# Altium PCB PCB1.pcbdoc (part 1 of 3)
Units mil, origin at the board's own origin, x right, y up, seen from the top; angles counter-clockwise.
Board outline 4439.01 x 4693.87 mil, 2 copper layers (Top Layer, Bottom Layer); 119 components, 135 nets, 555 pads, 196 vias.
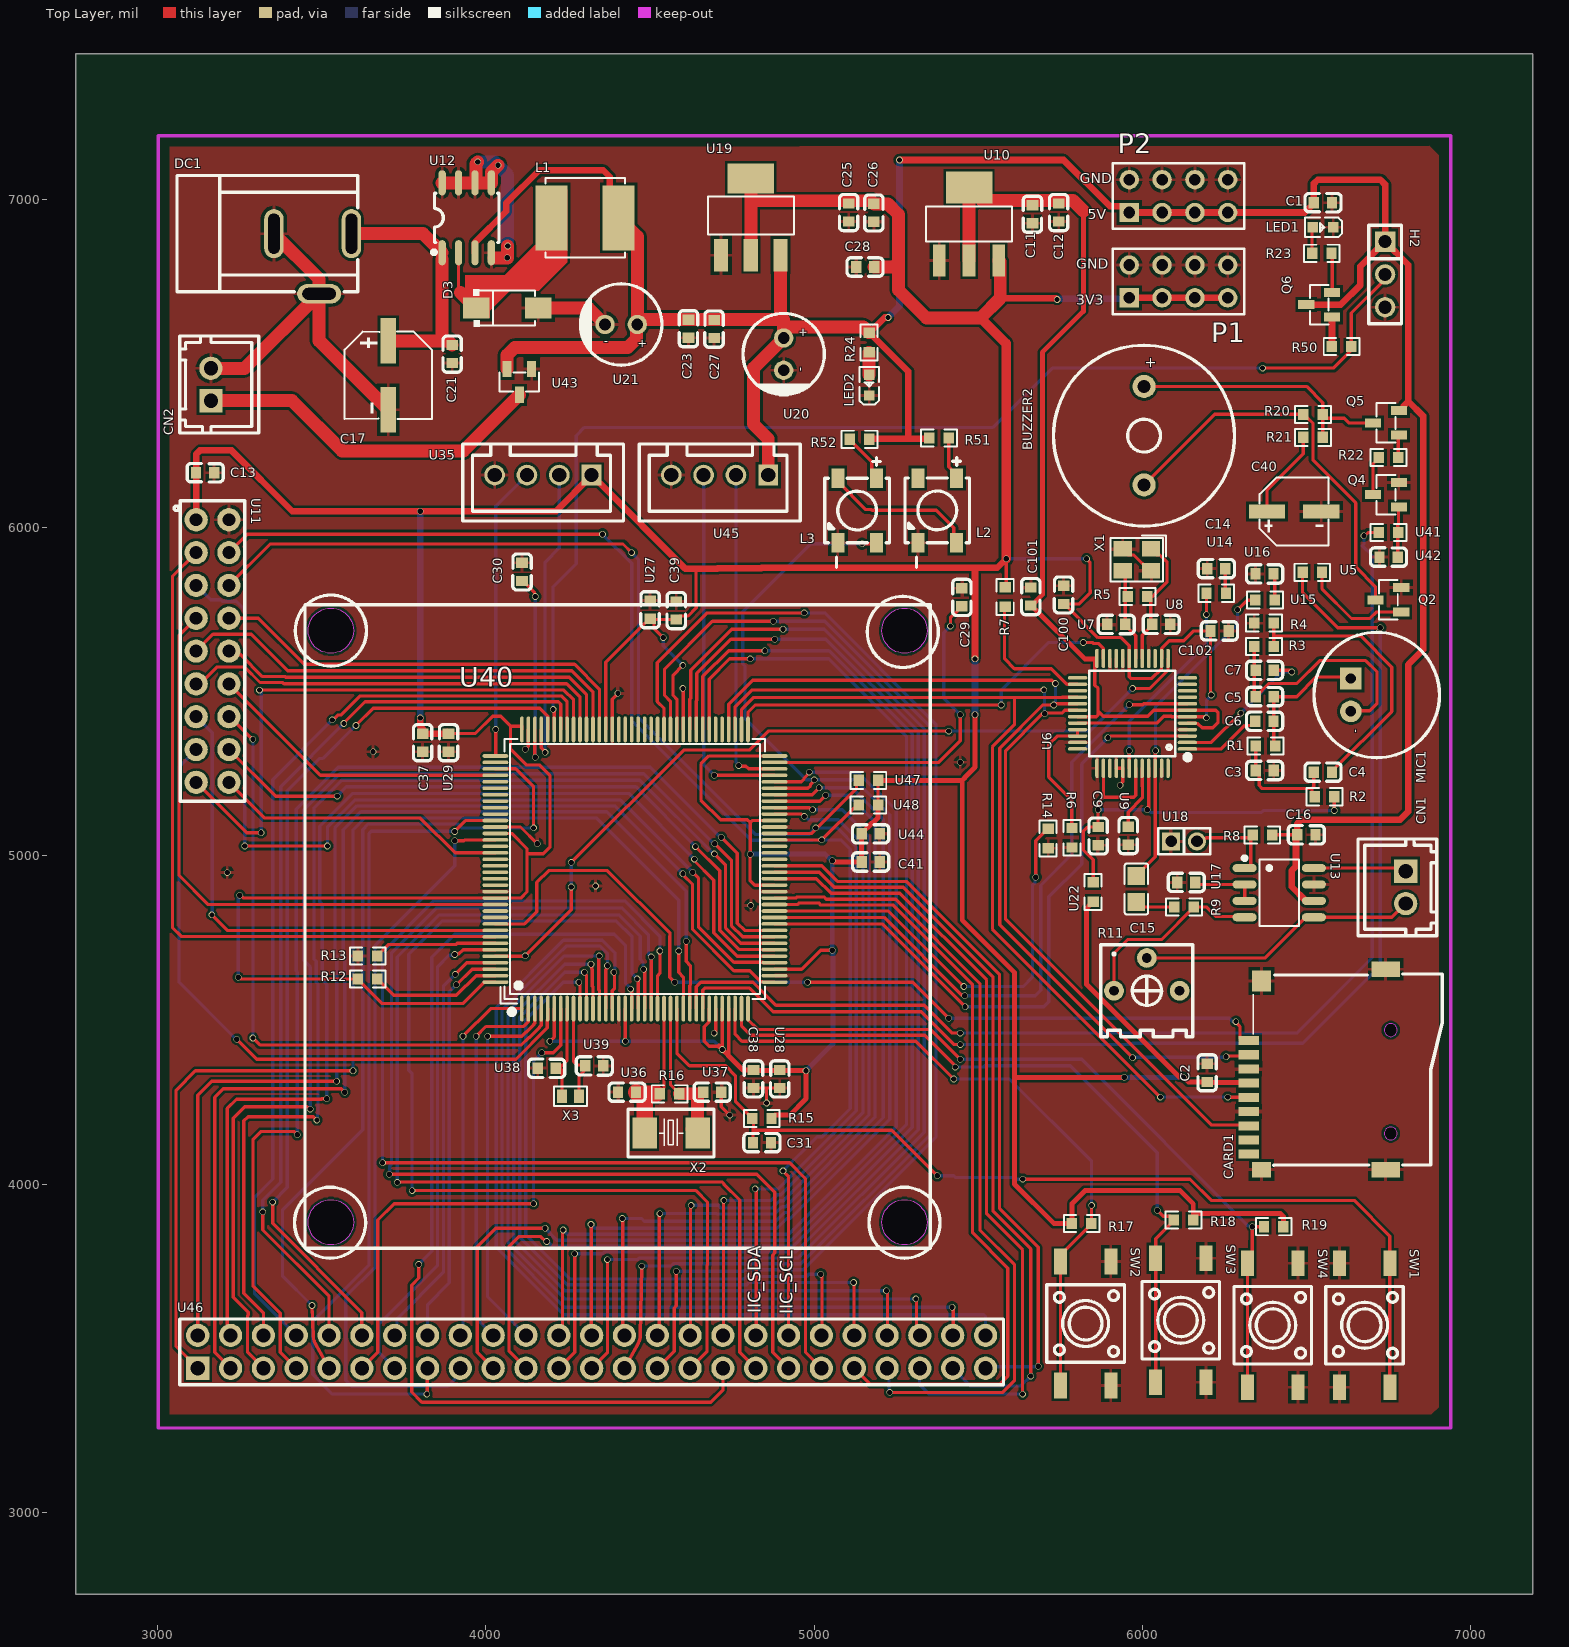
[diagram p0: Top Layer view]
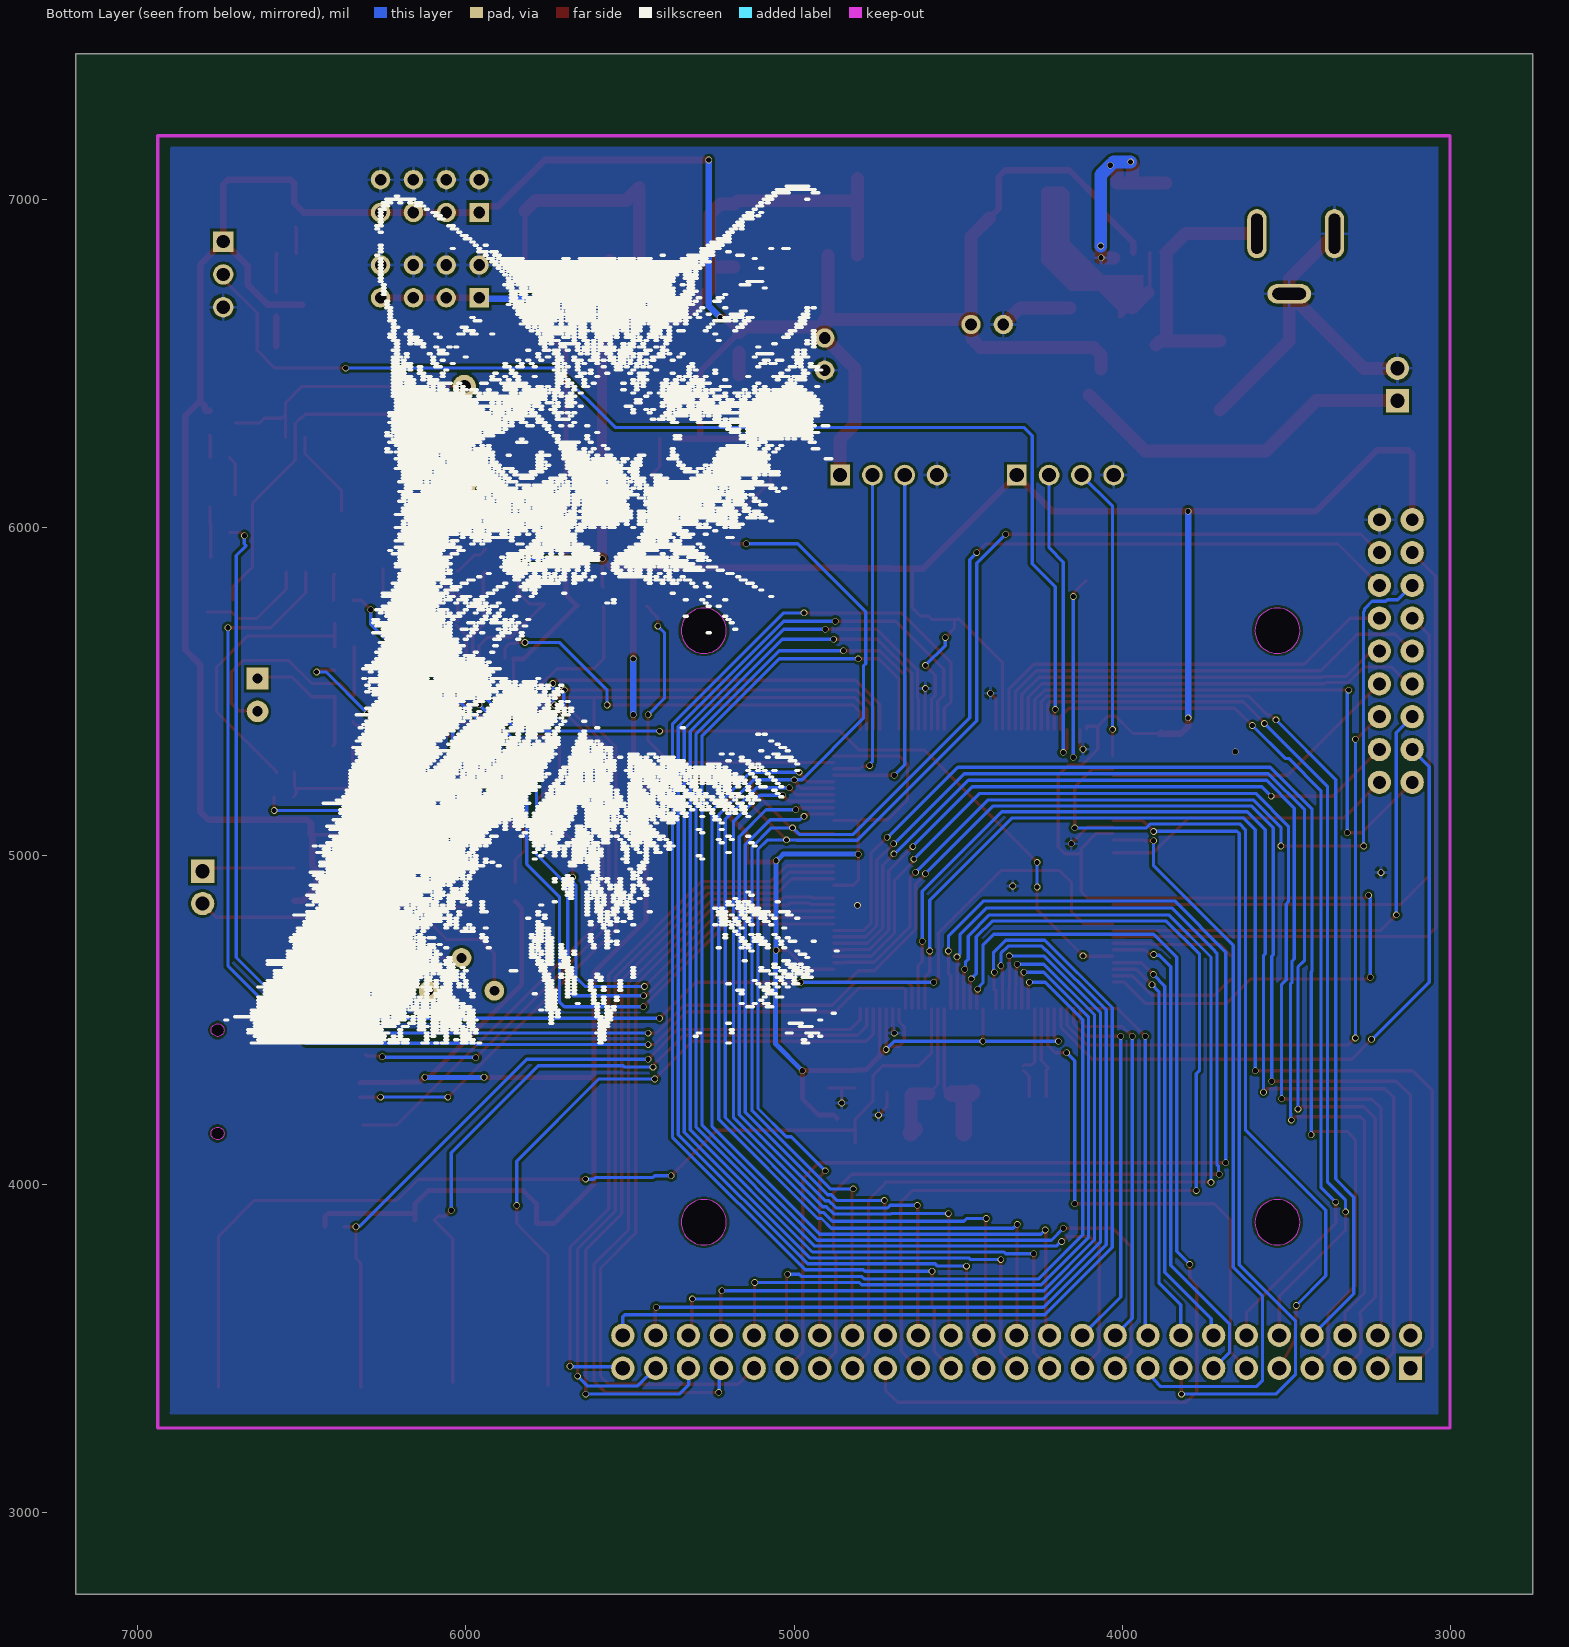
[diagram p1: Bottom Layer view, seen from below]

## Layer stack, top to bottom
Top Solder Mask Layer: solder mask 0.4, Solder Resist, Dk 3.5
Top Layer: signal copper 1.4
Dielectric1: dielectric 12.6, FR-4, Dk 4.8
Bottom Layer: signal copper 1.4
Bottom Solder Mask Layer: solder mask 0.4, Solder Resist, Dk 3.5

## Board outline
7189.01,2750 2750,2750 2750,7443.87 7189.01,7443.87
cut-out: 3527.64,5617.16 cw(c3527.64,5686.06) 3458.74,5686.06 cw(c3527.64,5686.06) 3527.64,5754.95 cw(c3527.64,5686.06) 3596.53,5686.06 cw(c3527.64,5686.06)
cut-out: 5275.15,5617.16 cw(c5275.15,5686.06) 5206.26,5686.06 cw(c5275.15,5686.06) 5275.15,5754.95 cw(c5275.15,5686.06) 5344.05,5686.06 cw(c5275.15,5686.06)
cut-out: 5275.15,3814.64 cw(c5275.15,3883.54) 5206.26,3883.54 cw(c5275.15,3883.54) 5275.15,3952.43 cw(c5275.15,3883.54) 5344.05,3883.54 cw(c5275.15,3883.54)
cut-out: 3527.64,3814.64 cw(c3527.64,3883.54) 3458.74,3883.54 cw(c3527.64,3883.54) 3527.64,3952.43 cw(c3527.64,3883.54) 3596.53,3883.54 cw(c3527.64,3883.54)

## Design rules (kind name [scope] priority, off if disabled: settings)
Clearance [All] p1: gap=8 ignorepadtopadclearanceinfootprint=TRUE except(0: Arc-Hole Track-Hole SMDPad-Hole THPad-Hole Via-Hole Fill-Hole Poly-Hole Region-Hole Text-Hole)
FanoutControl Fanout_Default [All] p1: bgadir=Out bgaviamode=Centered fanoutstyle=Auto fanoutdirection=Alternating viagrid=1 // Fanout_Default (Default Rule)
FanoutControl Fanout_Small [(CompPinCount < 5)] p2: bgadir=Out bgaviamode=Centered fanoutstyle=Auto fanoutdirection=OutThenIn viagrid=1 // Fanout_Small (Default Rule)
FanoutControl Fanout_LCC [IsLCC] p4: bgadir=Out bgaviamode=Centered fanoutstyle=Auto fanoutdirection=Alternating viagrid=1 // Fanout_LCC (Default Rule)
FanoutControl Fanout_BGA [IsBGA] p5: bgadir=Out bgaviamode=Centered fanoutstyle=Auto fanoutdirection=Alternating viagrid=1 // Fanout_BGA (Default Rule)
HoleSize [All] p1: absolutevalues=TRUE maxlimit=157.48 minlimit=11.81 maxpercent=80.000 minpercent=20.000
MinimumSolderMaskSliver [All] p1: minsoldermaskwidth=1.97
PolygonConnect [All] p1: connectstyle=Relief reliefconductorwidth=10 reliefentries=4 polygonreliefangle="90 Angle" airgapwidth=10
RoutingVias [All] p1: holewidth=16 width=20 viastyle="Through Hole" minholewidth=14 minwidth=20 maxholewidth=20 maxwidth=20
SilkToSilkClearance [All] p1: silktosilkclearance=6
SilkToSolderMaskClearance [IsPad] p1: minsilkscreentomaskgap=0 clearancetoexposedcopper=TRUE
SolderMaskExpansion [All] p1: expansion=4 istentingtop=FALSE
UnRoutedNet [All] p1: checkbadconnections=TRUE
Width [All] p1: maxlimit=50 minlimit=8 preferedwidth=10
21 further rules are at their usual default settings.

## Classes and differential pairs
component class 4_POW.schdoc: C11 C12 C17 C21 C23 C25 C26 C27 C28 CN2 D3 DC1 L1 LED2 P1 P2 R24 U10 U12 U19 U20 U21 U22 U43
component class 3_语音模块.schdoc: C3 C4 C5 C6 C7 C9 C14 C15 C16 C100 C101 C102 CN1 MIC1 R1 R2 R3 R4 R5 R6 R7 R8 R9 R11 U6 U7 U8 U9 U13 U14 U15 U16 U17 U18 X1
component class 2_MCU.schdoc: C29 C30 C31 C37 C38 C39 C41 R12 R13 R14 R15 R16 SW1 U27 U28 U29 U35 U36 U37 U38 U39 U40 U44 U45 U46 U47 U48 X2 X3
component class 1_Board.schdoc: BUZZER2 C1 C2 C13 C40 CARD1 H2 L2 L3 LED1 Q2 Q4 Q5 Q6 R17 R18 R19 R20 R21 R22 R23 R50 R51 R52 SW2 SW3 SW4 U5 U11 U41 U42

## Components (designator, comment, footprint, x,y, rotation, side; value= is the part's Value field where it differs from the comment)
BUZZER2 "4000Hz" BUZ-TH_BD14.0-P7.60-D0.7-FD 6005,6279.99 r270 top
C1 "100nF" C0603 6550,6990 r180 top
C2 "100nF" C0603 6197,4338.68 r270 top
C3 "10uF" C0603 6372.56,5260 r0 top
C4 "10uF" C0603 6550,5255 r180 top
C5 "100pF" C0603 6372.44,5485 r0 top
C6 "1uF" C0603 6371.83,5410 r180 top
C7 "1uF" C0603 6372.44,5565 r0 top
C9 "100nF" C0603 5865,5060 r270 top
C11 "100nF" C0603 5665,6955 r90 top
C12 "10uF" C0603 5745,6960 r90 top
C13 "100nF" C0603 3144.26,6167.18 r180 top
C14 "47nF" C0603 6225,5875 r180 top
C15 "470nF" C0805 5981.55,4898.87 r270 top
C16 "100nF" C0603 6499.6,5063.87 r0 top
C17 "470uF" CAP-SMD_BD6.3-L6.6-W6.6-LS7.6-RD 3702,6463.87 r270 top
C21 "100nF" C0603 3897,6528.87 r90 top
C23 "100nF" C0603 4617,6606.16 r90 top
C25 "10uF" C0603 5105,6960 r90 top
C26 "100nF" C0603 5182,6958.87 r90 top
C27 "100nF" C0603 4695,6605 r90 top
C28 "100nF" C0603 5155.23,6793.87 r0 top
C29 "2.2uF" C0603 5450,5787.56 r90 top
C30 "2.2uF" C0603 4110,5865 r90 top
C31 "100nF" C0603 4841.08,4126.13 r0 top
C37 "100nF" C0603 3806.93,5344.49 r270 top
C38 "100nF" C0603 4815,4320 r270 top
C39 "100nF" C0603 4580,5747.44 r90 top
C40 "RST47UF16V034" CAP-SMD_BD5.0-L5.3-W5.3-LS6.0-FD 6462,6048.83 r0 top
C41 "100nF" C0603 5172.34,4981.04 r0 top
C100 "100nF" C0603 5760,5795 r90 top
C101 "100nF" C0603 5660,5790 r90 top
C102 "100nF" C0603 6235,5685 r0 top
CARD1 "TF-01A" TF-SMD_TF-02 6532.2,4348.87 r90 top
CN1 "ZX-XH2.54-2PZZ" CONN-TH_2P-P2.50_HX25003-2A 6802.2,4903.87 r270 top
CN2 "ZX-XH2.54-2PZZ" CONN-TH_2P-P2.50_HX25003-2A 3162,6435.95 r90 top
D3 "SS34" SMA_L4.3-W2.6-LS5.0-RD 4064.88,6668.87 r0 top
DC1 "DC-005-A200" DC-IN-TH_DC-005-A200 3472,6803.87 r0 top
H2 "PM254V-11-03-H85" HDR-TH_3P-P2.54-V-F 6739.43,6771.32 r270 top
L1 "68uH" IND-SMD_L6.0-W6.0_SWPA6045S 4302,6943.65 r0 top
L2 "RGB" RGB 5374.93,6052.39 r180 top
L3 "RGB" RGB 5130.98,6051.96 r180 top
LED1 "NCD0603G1" LED0603-RD 6550,6915 r180 top
LED2 "NCD0603G1" LED0603-RD 5167.76,6433.87 r90 top
MIC1 "GMI9767P-52DB" MIC-TH_BD9.7-P2.54-D0.8-L-FD 6635,5490 r270 top
P1 "Header 4X2" HDR2X4 5960,6700 r0 top
P2 "Header 4X2" HDR2X4 5960,6960 r0 top
Q2 "SS8050" SOT-23-3_L2.9-W1.3-P1.90-LS2.4-BR 6749.37,5780 r0 top
Q4 "SS8050" SOT-23-3_L2.9-W1.3-P1.90-LS2.4-BR 6741.93,6100.41 r0 top
Q5 "SS8550" SOT-23-3_L2.9-W1.3-P1.90-LS2.4-BR 6741.93,6318.87 r0 top
Q6 "SS8050" SOT-23-3_L2.9-W1.3-P1.90-LS2.4-BR 6538.67,6679.41 r0 top
R1 "1k" R0603 6375,5335 r180 top
R2 "1k" R0603 6555,5180 r0 top
R3 "1k" R0603 6370.29,5637.3 r180 top
R4 "1k" R0603 6370.29,5708.87 r180 top
R5 "1MΩ" R0603 5985,5790 r180 top
R6 "100kΩ" R0603 5785,5055 r270 top
R7 "100kΩ" R0603 5582,5788.87 r90 top
R8 "10kΩ" R0603 6365.3,5063.87 r0 top
R9 "1kΩ" R0603 6126.92,4843.87 r0 top
R11 "10kΩ" RES-ADJ-TH_3362P 6013.45,4638.87 r0 top
R12 "0Ω" R0603 3639.66,4625 r180 top
R13 "10kΩ" R0603 3639.66,4695 r180 top
R14 "10kΩ" R0603 5712.96,5052.8 r270 top
R15 "10kΩ" R0603 4840.34,4200 r0 top
R16 "1MΩ" R0603 4559.66,4275 r180 top
R17 "10kΩ" R0603 5815,3880 r180 top
R18 "10kΩ" R0603 6125.34,3890 r0 top
R19 "10kΩ" R0603 6400,3870 r0 top
R20 "2.2kΩ" R0603 6520,6345 r0 top
R21 "330Ω" R0603 6520,6275 r0 top
R22 "1kΩ" R0603 6749.75,6213.87 r0 top
R23 "1kΩ" R0603 6546.5,6835.76 r0 top
R24 "1kΩ" R0603 5167.55,6563.87 r90 top
R50 "1kΩ" R0603 6607,6552 r0 top
R51 "1kΩ" R0603 5380,6273 r180 top
R52 "1kΩ" R0603 5138,6269 r0 top
SW1 "K2-6639SP-C4SC-04" KEY-SMD_4P-L6.0-W6.0-P3.90-LS10.0 6677,3569.89 r270 top
SW2 "K2-6639SP-C4SC-04" KEY-SMD_4P-L6.0-W6.0-P3.90-LS10.0 5827,3574.89 r270 top
SW3 "K2-6639SP-C4SC-04" KEY-SMD_4P-L6.0-W6.0-P3.90-LS10.0 6117,3584.89 r270 top
SW4 "K2-6639SP-C4SC-04" KEY-SMD_4P-L6.0-W6.0-P3.90-LS10.0 6397,3569.89 r270 top
U5 "2kΩ" R0603 6517.62,5863.87 r180 top
U6 "VS1053B-L" LQFP-48_L7.0-W7.0-P0.50-LS9.0-BL 5969.81,5433.87 r90 top
U7 "18pF" C0603 5920,5705 r180 top
U8 "18pF" C0603 6057.56,5705 r0 top
U9 "1uF" C0603 5956.62,5061.31 r270 top
U10 "AMS1117-1.8" SOT-223-4_L6.5-W3.5-P2.30-LS7.0-BR 5471.86,6924.98 r270 top
U11 "PM254-2-09-Z-8.5" HDR-TH_18P-P2.54-V-F-R2-C9-S2.54 3167,5623.87 r270 top
U12 "XL1509-5.0E1" SOIC-8_L5.0-W4.0-P1.27-LS6.0-BL 3941.53,6943.87 r0 top
U13 "NS8002" SOP-8_L4.9-W3.9-P1.27-LS6.0-BL 6417,4887.68 r270 top
U14 "10Ω" R0603 6225,5800 r0 top
U15 "10Ω" R0603 6373.61,5778.91 r0 top
U16 "10nF" C0603 6372,5858.87 r180 top
U17 "1uF" C0603 6133.91,4918.87 r0 top
U18 "PZ200-1-02-Z-C" HDR-TH_2P-P2.00-V-M-3 6126.76,5043.87 r0 top
U19 "AMS1117-3.3" SOT-223-3_L6.5-W3.4-P2.30-LS7.0-BR 4807,6946.78 r270 top
U20 "10uF" CAP-TH_BD6.3-P2.50-D0.5-FD 4907,6528.57 r270 top
U21 "10uF" CAP-TH_BD6.3-P2.50-D0.5-FD 4412,6618.87 r180 top
U22 "10Ω" R0603 5850,4890 r90 top
U27 "10uF" C0603 4500,5750 r90 top
U28 "10uF" C0603 4895,4320 r270 top
U29 "10uF" C0603 3885.91,5344.49 r270 top
U35 "ZX-XH2.54-4PZZ" CONN-TH_4P-P2.50_4PIN 4174.21,6160 r180 top
U36 "18pF" C0603 4429.66,4280 r180 top
U37 "18pF" C0603 4689.66,4280 r0 top
U38 "18pF" C0603 4185.17,4352.53 r0 top
U39 "18pF" C0603 4330,4360 r180 top
U40 "STM32F407ZET6" LQFP-144_L20.0-W20.0-P0.50-LS22.0-BL 4453.9,4959.8 r0 top locked
U41 "2kΩ" R0603 6750,5985 r180 top
U42 "10nF" C0603 6750,5910 r0 top
U43 "SI2301-ZE" SOT-23-3_L2.9-W1.3-P1.90-LS2.4-BR 4102,6443.87 r90 top
U44 "10uF" C0603 5172.34,5066.85 r0 top
U45 "ZX-XH2.54-4PZZ" CONN-TH_4P-P2.50_4PIN 4712.36,6160 r180 top
U46 "PZ2.54-2*25" HDR-TH_50P-P2.54-V-M-R2-C25-S2.54 4322,3488.87 r0 top
U47 "4.7kΩ" R0603 5165,5230 r180 top
U48 "4.7kΩ" R0603 5165,5155 r180 top
X1 "12.288MHz" CRYSTAL-SMD_4P-L3.2-W2.5-BL 5983.31,5901.53 r180 top
X2 "8MHz" OSC-SMD_L5.0-W3.2 4563.95,4155 r180 top
X3 "-" OSC-SMD_2P-L1.6-W1.0 4257.73,4267.53 r0 top

## Footprints (in the part's own frame and the unit in brackets; to place one, negate y for a bottom-side part, rotate by r counter-clockwise, add the part's x,y. Pads: shape width x height; smd on the part's side, far side on the other; paste and mask are expansions set on the pad)
BUZ-TH_BD14.0-P7.60-D0.7-FD [mm]
  round 1.8 hole 1: 1(-3.81,0) 2(3.81,0)
  silkscreen extent -7,-7 7,7
C0603 [mm]
  rect 0.8x0.9 smd: 1(-0.7,0) 2(0.7,0)
  silkscreen extent -1.41,-0.71 1.39,0.72
C0805 [mm]
  rect 1.41x1.35 smd paste-100 mask+0.051: 1(-1,0) 2(1,0)
  silkscreen extent -1.96,-0.9 1.96,0.9
CAP-SMD_BD5.0-L5.3-W5.3-LS6.0-FD [mm]
  rect 2.8x1.1 smd: 1(-2.1,0) 2(2.1,0)
  silkscreen extent -2.66,-2.62 2.66,2.65
CAP-SMD_BD6.3-L6.6-W6.6-LS7.6-RD [mm]
  rect 3.5x1.2 smd: 1(-2.67,0) 2(2.67,0)
  silkscreen extent -3.38,-3.38 3.38,3.38
CAP-TH_BD6.3-P2.50-D0.5-FD [mm]
  round 1.5 hole 0.9 paste+0 mask+0.05: 1(-1.25,0) 2(1.25,0)
  silkscreen extent -3.15,-3.15 3.21,3.15
CONN-TH_2P-P2.50_HX25003-2A [mm]
  rect 1.8x1.8 hole 1.1 paste+0 mask+0.05: 1(-1.25,0)
  round 1.8 hole 1.1 paste+0 mask+0.05: 2(1.25,0)
  silkscreen extent -3.75,-3.7 3.75,2.41
CONN-TH_4P-P2.50_4PIN [mm]
  rect 1.524x1.6 hole 1.1: 1(-3.75,0)
  round 1.6 hole 1.1: 2(-1.25,0) 3(1.25,0) 4(3.75,0)
  silkscreen extent -6.22,-2.41 6.22,3.56
CRYSTAL-SMD_4P-L3.2-W2.5-BL [mm]
  rect 1.4x1.2 smd: 1(-1.1,-0.85) 2(1.1,-0.85) 3(1.1,0.85) 4(-1.1,0.85)
  silkscreen extent -2.26,-1.91 2.03,1.68
DC-IN-TH_DC-005-A200 [mm]
  oval 1.5x3.8 hole 0.9 slot 3.1 at 90 deg: 1(3,2.325) 2(-3,2.325)
  oval 3.4x1.5 hole 0.9 slot 2.6 at 0 deg: 3(0.5,-2.325)
  silkscreen extent -10.5,-2.17 3.5,6.83
HDR2X4 [mm] "Connector; Header; 4x2 Position"
  rect 1.5x1.5 hole 0.9: 1(0,0)
  round 1.5 hole 0.9: 2(0,2.54) 3(2.54,0) 4(2.54,2.54) 5(5.08,0) 6(5.08,2.54) 7(7.62,0) 8(7.62,2.54)
  silkscreen extent -1.27,-1.27 8.89,3.81
HDR-TH_2P-P2.00-V-M-3 [mm]
  rect 1.4x1.4 hole 0.9: 1(-1,0)
  round 1.4 hole 0.9: 2(1,0)
  silkscreen extent -1.99,-1 2.02,1.03
HDR-TH_3P-P2.54-V-F [mil]
  rect 62x62 hole 40.16: 1(-100,0)
  round 62 hole 40.16: 2(0,0) 3(100,0)
  silkscreen extent -150,-50 150,50
HDR-TH_18P-P2.54-V-F-R2-C9-S2.54 [mm]
  round 1.8 hole 1: 1(-10.16,-1.27) 2(-10.16,1.27) 3(-7.62,-1.27) 4(-7.62,1.27) 5(-5.08,-1.27) 6(-5.08,1.27) 7(-2.54,-1.27) 8(-2.54,1.27) 9(0,-1.27) 10(0,1.27) 11(2.54,-1.27) 12(2.54,1.27) 13(5.08,-1.27) 14(5.08,1.27) 15(7.62,-1.27) 16(7.62,1.27) 17(10.16,-1.27) 18(10.16,1.27)
  silkscreen extent -11.63,-2.97 11.63,2.5
HDR-TH_50P-P2.54-V-M-R2-C25-S2.54 [mm]
  rect 1.8x1.8 hole 1.1: 1(-30.48,-1.27)
  round 1.8 hole 1.1: 2(-30.48,1.27) 3(-27.94,-1.27) 4(-27.94,1.27) 5(-25.4,-1.27) 6(-25.4,1.27) 7(-22.86,-1.27) 8(-22.86,1.27) 9(-20.32,-1.27) 10(-20.32,1.27) 11(-17.78,-1.27) 12(-17.78,1.27) 13(-15.24,-1.27) 14(-15.24,1.27) 15(-12.7,-1.27) 16(-12.7,1.27) 17(-10.16,-1.27) 18(-10.16,1.27) 19(-7.62,-1.27) 20(-7.62,1.27) 21(-5.08,-1.27) 22(-5.08,1.27) 23(-2.54,-1.27) 24(-2.54,1.27) 25(0,-1.27) 26(0,1.27) 27(2.54,-1.27) 28(2.54,1.27) 29(5.08,-1.27) 30(5.08,1.27) 31(7.62,-1.27) 32(7.62,1.27) 33(10.16,-1.27) 34(10.16,1.27) 35(12.7,-1.27) 36(12.7,1.27) 37(15.24,-1.27) 38(15.24,1.27) 39(17.78,-1.27) 40(17.78,1.27) 41(20.32,-1.27) 42(20.32,1.27) 43(22.86,-1.27) 44(22.86,1.27) 45(25.4,-1.27) 46(25.4,1.27) 47(27.94,-1.27) 48(27.94,1.27) 49(30.48,-1.27) 50(30.48,1.27)
  silkscreen extent -31.88,-2.54 31.88,2.54
IND-SMD_L6.0-W6.0_SWPA6045S [mm]
  rect 2.474x5.02 smd: 1(-2.603,0) 2(2.603,0)
  silkscreen extent -3.08,-3.08 3.08,3.08
KEY-SMD_4P-L6.0-W6.0-P3.90-LS10.0 [mm]
  rect 2x1 smd: 1(-4.8,1.95) 2(4.8,1.95) 3(-4.8,-1.95) 4(4.8,-1.95)
  silkscreen extent -3,-3 3,3
LED0603-RD [mm]
  rect 0.8x0.8 smd: 1(-0.799,-0.003) 2(0.799,0.003)
  silkscreen extent -1.49,-0.75 1.39,0.76
LQFP-48_L7.0-W7.0-P0.50-LS9.0-BL [mm]
  oval 0.27x1.5 smd paste+0 mask+0.05: 1(-2.75,-4.25) 2(-2.25,-4.25) 3(-1.75,-4.25) 4(-1.25,-4.25) 5(-0.75,-4.25) 6(-0.25,-4.25) 7(0.25,-4.25) 8(0.75,-4.25) 9(1.25,-4.25) 10(1.75,-4.25) 11(2.25,-4.25) 12(2.75,-4.25) 25(2.75,4.25) 26(2.25,4.25) 27(1.75,4.25) 28(1.25,4.25) 29(0.75,4.25) 30(0.25,4.25) 31(-0.25,4.25) 32(-0.75,4.25) 33(-1.25,4.25) 34(-1.75,4.25) 35(-2.25,4.25) 36(-2.75,4.25)
  oval 1.5x0.27 smd paste+0 mask+0.05: 13(4.25,-2.75) 14(4.25,-2.25) 15(4.25,-1.75) 16(4.25,-1.25) 17(4.25,-0.75) 18(4.25,-0.25) 19(4.25,0.25) 20(4.25,0.75) 21(4.25,1.25) 22(4.25,1.75) 23(4.25,2.25) 24(4.25,2.75) 37(-4.25,2.75) 38(-4.25,2.25) 39(-4.25,1.75) 40(-4.25,1.25) 41(-4.25,0.75) 42(-4.25,0.25) 43(-4.25,-0.25) 44(-4.25,-0.75) 45(-4.25,-1.25) 46(-4.25,-1.75) 47(-4.25,-2.25) 48(-4.25,-2.75)
  silkscreen extent -3.59,-4.46 3.3,3.34
LQFP-144_L20.0-W20.0-P0.50-LS22.0-BL [mm]
  oval 0.28x2 smd: 1(-8.75,-10.8) 2(-8.25,-10.8) 3(-7.75,-10.8) 4(-7.25,-10.8) 5(-6.75,-10.8) 6(-6.25,-10.8) 7(-5.75,-10.8) 8(-5.25,-10.8) 9(-4.75,-10.8) 10(-4.25,-10.8) 11(-3.75,-10.8) 12(-3.25,-10.8) 13(-2.75,-10.8) 14(-2.25,-10.8) 15(-1.75,-10.8) 16(-1.25,-10.8) 17(-0.75,-10.8) 18(-0.25,-10.8) 19(0.25,-10.8) 20(0.75,-10.8) 21(1.25,-10.8) 22(1.75,-10.8) 23(2.25,-10.8) 24(2.75,-10.8) 25(3.25,-10.8) 26(3.75,-10.8) 27(4.25,-10.8) 28(4.75,-10.8) 29(5.25,-10.8) 30(5.75,-10.8) 31(6.25,-10.8) 32(6.75,-10.8) 33(7.25,-10.8) 34(7.75,-10.8) 35(8.25,-10.8) 36(8.75,-10.8) 73(8.75,10.8) 74(8.25,10.8) 75(7.75,10.8) 76(7.25,10.8) 77(6.75,10.8) 78(6.25,10.8) 79(5.75,10.8) 80(5.25,10.8) 81(4.75,10.8) 82(4.25,10.8) 83(3.75,10.8) 84(3.25,10.8) 85(2.75,10.8) 86(2.25,10.8) 87(1.75,10.8) 88(1.25,10.8) 89(0.75,10.8) 90(0.25,10.8) 91(-0.25,10.8) 92(-0.75,10.8) 93(-1.25,10.8) 94(-1.75,10.8) 95(-2.25,10.8) 96(-2.75,10.8) 97(-3.25,10.8) 98(-3.75,10.8) 99(-4.25,10.8) 100(-4.75,10.8) 101(-5.25,10.8) 102(-5.75,10.8) 103(-6.25,10.8) 104(-6.75,10.8) 105(-7.25,10.8) 106(-7.75,10.8) 107(-8.25,10.8) 108(-8.75,10.8)
  oval 2x0.28 smd: 37(10.8,-8.75) 38(10.8,-8.25) 39(10.8,-7.75) 40(10.8,-7.25) 41(10.8,-6.75) 42(10.8,-6.25) 43(10.8,-5.75) 44(10.8,-5.25) 45(10.8,-4.75) 46(10.8,-4.25) 47(10.8,-3.75) 48(10.8,-3.25) 49(10.8,-2.75) 50(10.8,-2.25) 51(10.8,-1.75) 52(10.8,-1.25) 53(10.8,-0.75) 54(10.8,-0.25) 55(10.8,0.25) 56(10.8,0.75) 57(10.8,1.25) 58(10.8,1.75) 59(10.8,2.25) 60(10.8,2.75) 61(10.8,3.25) 62(10.8,3.75) 63(10.8,4.25) 64(10.8,4.75) 65(10.8,5.25) 66(10.8,5.75) 67(10.8,6.25) 68(10.8,6.75) 69(10.8,7.25) 70(10.8,7.75) 71(10.8,8.25) 72(10.8,8.75) 109(-10.8,8.75) 110(-10.8,8.25) 111(-10.8,7.75) 112(-10.8,7.25) 113(-10.8,6.75) 114(-10.8,6.25) 115(-10.8,5.75) 116(-10.8,5.25) 117(-10.8,4.75) 118(-10.8,4.25) 119(-10.8,3.75) 120(-10.8,3.25) 121(-10.8,2.75) 122(-10.8,2.25) 123(-10.8,1.75) 124(-10.8,1.25) 125(-10.8,0.75) 126(-10.8,0.25) 127(-10.8,-0.25) 128(-10.8,-0.75) 129(-10.8,-1.25) 130(-10.8,-1.75) 131(-10.8,-2.25) 132(-10.8,-2.75) 133(-10.8,-3.25) 134(-10.8,-3.75) 135(-10.8,-4.25) 136(-10.8,-4.75) 137(-10.8,-5.25) 138(-10.8,-5.75) 139(-10.8,-6.25) 140(-10.8,-6.75) 141(-10.8,-7.25) 142(-10.8,-7.75) 143(-10.8,-8.25) 144(-10.8,-8.75)
  silkscreen extent -10.41,-11.25 10.08,10.08
MIC-TH_BD9.7-P2.54-D0.8-L-FD [mil]
  rect 66x66 hole 31.5: 1(-50,0)
  round 66 hole 31.5: 2(50,0)
  silkscreen extent -191,-112 191,270
OSC-SMD_2P-L1.6-W1.0 [mm]
  rect 0.8x1.06 smd: 1(-0.66,0) 2(0.66,0)
  silkscreen extent -1.29,-0.76 1.29,0.76
OSC-SMD_L5.0-W3.2 [mm]
  rect 1.9x2.4 smd: 1(-2.05,0) 2(2.05,0)
  silkscreen extent -3.32,-1.85 3.33,1.85
R0603 [mil]
  rect 31.75x34.02 smd paste-3937.01 mask+2: 1(-29.66,0) 2(29.66,0)
  silkscreen extent -55,-26 55,26
RES-ADJ-TH_3362P [mil]
  round 60 hole 30: 1(-100,-50) 2(0,50) 3(100,-50)
  silkscreen extent -140,-190 140,90
RGB [mm]
  rect 1x1.5 smd: 1(-1.5,-2.5) 2(1.5,-2.5) 3(1.5,2.5) 4(-1.5,2.5)
  silkscreen extent -2.5,-4.1 2.5,4.4
SMA_L4.3-W2.6-LS5.0-RD [mm]
  rect 2.046x1.62 smd: 1(-2.404,-0.009) 2(2.404,0.009)
  silkscreen extent -2.61,-1.44 2.16,1.44
SOIC-8_L5.0-W4.0-P1.27-LS6.0-BL [mil]
  oval 22.38x76.78 smd: 1(-75,-106.5) 2(-25,-106.5) 3(25,-106.5) 4(75,-106.5) 5(75,106.5) 6(25,106.5) 7(-25,106.5) 8(-75,106.5)
  silkscreen extent -106,-111 98,75
SOP-8_L4.9-W3.9-P1.27-LS6.0-BL [mm]
  oval 0.63x1.865 smd: 1(-1.905,-2.682) 2(-0.635,-2.682) 3(0.635,-2.682) 4(1.905,-2.682) 5(1.905,2.682) 6(0.635,2.682) 7(-0.635,2.682) 8(-1.905,2.682)
  silkscreen extent -2.82,-2.83 2.58,1.52
SOT-23-3_L2.9-W1.3-P1.90-LS2.4-BR [mm]
  rect 1.25x0.7 smd: 1(1,-0.95) 2(1,0.95) 3(-1,0)
  silkscreen extent -0.73,-1.53 0.73,1.53
SOT-223-3_L6.5-W3.4-P2.30-LS7.0-BR [mm]
  rect 2.5x1.1 smd: 1(2.97,-2.3) 2(2.97,0) 3(2.97,2.3)
  rect 2.34x3.6 smd: 4(-2.97,0)
  silkscreen extent -1.57,-3.33 1.37,3.33
SOT-223-4_L6.5-W3.5-P2.30-LS7.0-BR [mm]
  rect 2.47x0.98 smd: 1(2.835,-2.3) 2(2.835,0) 3(2.835,2.3)
  rect 2.47x3.6 smd: 4(-2.835,0)
  silkscreen extent -1.37,-3.33 1.37,3.33
TF-SMD_TF-02 [mm]
  rect 0.7x1.6 smd: 1(2.245,5.3) 2(1.145,5.3) 3(0.046,5.3) 4(-1.054,5.3) 5(-2.154,5.3) 6(-3.255,5.3) 7(-4.354,5.3) 8(-5.454,5.3) 9(-6.554,5.3)
  rect 1.2x1.5 smd: 10(-7.754,4.3)
  rect 1.2x2.2 smd: 11(-7.746,-5.3) 12(7.754,-5.3)
  rect 1.6x1.5 smd: 13(6.854,4.3)
  Board Outline Layer board cut-out: 3.054,-6.2 3.271,-6.15 3.445,-6.012 3.541,-5.811 3.541,-5.589 3.445,-5.388 3.271,-5.25 3.054,-5.2 3.054,-5.2 2.837,-5.25 2.663,-5.388 2.567,-5.589 2.567,-5.811 2.663,-6.012 2.837,-6.15 3.054,-6.2 3.054,-6.2
  Board Outline Layer board cut-out: -4.946,-6.2 -4.729,-6.15 -4.555,-6.012 -4.459,-5.811 -4.459,-5.589 -4.555,-5.388 -4.729,-5.25 -4.946,-5.2 -4.946,-5.2 -5.163,-5.25 -5.337,-5.388 -5.433,-5.589 -5.433,-5.811 -5.337,-6.012 -5.163,-6.15 -4.946,-6.2 -4.946,-6.2
  Multi-Layer keep-out region: 3.054,-6.2 3.271,-6.15 3.445,-6.012 3.541,-5.811 3.541,-5.589 3.445,-5.388 3.271,-5.25 3.054,-5.2 3.054,-5.2 2.837,-5.25 2.663,-5.388 2.567,-5.589 2.567,-5.811 2.663,-6.012 2.837,-6.15 3.054,-6.2 3.054,-6.2
  Multi-Layer keep-out region: -4.946,-6.2 -4.729,-6.15 -4.555,-6.012 -4.459,-5.811 -4.459,-5.589 -4.555,-5.388 -4.729,-5.25 -4.946,-5.2 -4.946,-5.2 -5.163,-5.25 -5.337,-5.388 -5.433,-5.589 -5.433,-5.811 -5.337,-6.012 -5.163,-6.15 -4.946,-6.2 -4.946,-6.2
  silkscreen extent -7.41,-9.68 7.39,4.93

## Part data
BUZZER2: library part SFN-1407PA7.6, "驱动方式:无源(外部驱动);构造类型:压电式;额定电压:-;工作电压:-;消耗电流:-;频率:4000Hz;声压(SPL):85dB@5V,10cm;直径(φD):14mm;长度:-;宽度:-;高度:7.5mm;工作温度:-;", Current Consumption=-, JLCPCB Part Class=扩展库, LCSC Part Name=压电无源蜂鸣器, Manufacturer=S&amp;S(海旭), Add into BOM=yes, Convert to PCB=yes, Datasheet=https://atta.szlcsc.com/upload/public/pdf/source/20190422/C360603_0050A9658ADA60D80C9948846F925782.pdf, Device=SFN-1407PA7.6, Diameter (φD)=14mm, Height=7.5mm, Length=-, Manufacturer Part=SFN-1407PA7.6, Name=4000Hz, Operating Temperature=-, Operating Voltage=-, Oscillator Circuit=无源(外部驱动), Rated Voltage=-, Sound Pressure Level (SPL)=85dB@5V,10cm, Supplier=LCSC, Supplier Footprint=插件,P=7.6mm, Supplier Part=C360603, Symbol=SFN-1407PA7.6, Technology Type=压电式, Width=-
C1 C2 C13: library part 0603B104K500NT, "容值:100nF;精度:±10%;额定电压:50V;材质(温度系数):X7R;", JLCPCB Part Class=扩展库, LCSC Part Name="100nF ±10% 50V", Manufacturer=FH(风华), Temperature Coefficient=X7R, Tolerance=±10%, Voltage Rated=50V, Add into BOM=yes, Convert to PCB=yes, Datasheet=https://atta.szlcsc.com/upload/public/pdf/source/20170923/C30926_1506149436298988724.pdf, Device=0603B104K500NT, Manufacturer Part=0603B104K500NT, Name=100nF, Supplier=LCSC, Supplier Footprint=0603, Supplier Part=C30926, Symbol=0603B104K500NT
C3 C4: library part CL10A106MA8NRNC, "容值:10uF;精度:±20%;额定电压:25V;材质(温度系数):X5R;", JLCPCB Part Class=基础库, LCSC Part Name="10uF ±20% 25V", Manufacturer=SAMSUNG(三星), Temperature Coefficient=X5R, Tolerance=±20%, Voltage Rated=25V, Add into BOM=yes, Convert to PCB=yes, Datasheet=https://atta.szlcsc.com/upload/public/pdf/source/20170325/1490427913016.pdf, Device=CL10A106MA8NRNC, Manufacturer Part=CL10A106MA8NRNC, Name=10uF, Supplier=LCSC, Supplier Footprint=0603, Supplier Part=C96446, Symbol=CL10A106MA8NRNC
C5: library part CL10C101JB8NNNC, "容值:100pF;精度:±5%;额定电压:50V;材质(温度系数):C0G;", JLCPCB Part Class=基础库, LCSC Part Name="100pF ±5% 50V", Manufacturer=SAMSUNG(三星), Temperature Coefficient=C0G, Tolerance=±5%, Voltage Rated=50V, Add into BOM=yes, Convert to PCB=yes, Datasheet=https://atta.szlcsc.com/upload/public/pdf/source/20160103/1457707672333.pdf, Device=CL10C101JB8NNNC, Manufacturer Part=CL10C101JB8NNNC, Name=100pF, Supplier=LCSC, Supplier Footprint=0603, Supplier Part=C14858, Symbol=CL10C101JB8NNNC
C6 C7: library part CL10A105KB8NNNC, "容值:1uF;精度:±10%;额定电压:50V;材质(温度系数):X5R;", JLCPCB Part Class=基础库, LCSC Part Name="1uF ±10% 50V", Manufacturer=SAMSUNG(三星), Temperature Coefficient=X5R, Tolerance=±10%, Voltage Rated=50V, Add into BOM=yes, Convert to PCB=yes, Datasheet=https://atta.szlcsc.com/upload/public/pdf/source/20160103/1457707679084.pdf, Device=CL10A105KB8NNNC, Manufacturer Part=CL10A105KB8NNNC, Name=1uF, Supplier=LCSC, Supplier Footprint=0603, Supplier Part=C15849, Symbol=CL10A105KB8NNNC
C9 C11 C16 C21 C23 C26 C27 C28 C31 C37 C38 C39 C41 C100 C101 C102: library part CGA3E3X8R1H104M080AE, "容值:100nF;精度:±20%;额定电压:50V;材质(温度系数):X8R;", LCSC Part Name="100nF ±20% 50V", Manufacturer=TDK, Temperature Coefficient=X8R, Tolerance=±20%, Voltage Rated=50V, Add into BOM=yes, Convert to PCB=yes, Device=CGA3E3X8R1H104M080AE, Manufacturer Part=CGA3E3X8R1H104M080AE, Name=100nF, Supplier=LCSC, Supplier Footprint=0603, Supplier Part=C3855738, Symbol=CGA3E3X8R1H104M080AE
C12 C25: library part C1608X6S0J106M080AC, "容值:10uF;精度:±20%;额定电压:6.3V;材质(温度系数):X6S;", LCSC Part Name="10uF ±20% 6.3V", Manufacturer=TDK, Temperature Coefficient=X6S, Tolerance=±20%, Voltage Rated=6.3V, Add into BOM=yes, Convert to PCB=yes, Datasheet=https://atta.szlcsc.com/upload/public/pdf/source/20221212/519F8C46C56E78A46759B3245CB4AD37.pdf, Device=C1608X6S0J106M080AC, Manufacturer Part=C1608X6S0J106M080AC, Name=10uF, Supplier=LCSC, Supplier Footprint=0603, Supplier Part=C314596, Symbol=C1608X6S0J106M080AC_C314596-1
C14: library part C1608X8R1H473K080AA, "容值:47nF;额定电压:50V;材质(温度系数):X8R;", LCSC Part Name="47nF 50V", Manufacturer=TDK, Temperature Coefficient=X8R, Voltage Rated=50V, Add into BOM=yes, Convert to PCB=yes, Device=C1608X8R1H473K080AA, Manufacturer Part=C1608X8R1H473K080AA, Name=47nF, Supplier=LCSC, Supplier Footprint=0603, Supplier Part=C3890694, Symbol=C1608X8R1H473K080AA
C15: library part CC0805KKX7R0BB474, "容值:470nF;精度:±10%;额定电压:100V;材质(温度系数):X7R;", JLCPCB Part Class="Extended Part", LCSC Part Name="470nF ±10% 100V", Manufacturer=YAGEO(国巨), Temperature Coefficient=X7R, Tolerance=±10%, Voltage Rated=100V, Add into BOM=yes, Convert to PCB=yes, Datasheet=https://atta.szlcsc.com/upload/public/pdf/source/20200609/C596323_82E7DD20666BC3809E26A1262184D295.pdf, Device=CC0805KKX7R0BB474, Manufacturer Part=CC0805KKX7R0BB474, Name=470nF, Supplier=LCSC, Supplier Footprint=0805, Supplier Part=C596323, Symbol=GRM21BR60E107ME15L
C17: library part RVT1C471M0607, "容值:470uF;精度:±20%;额定电压:16V;电容体直径:6.3mm;电容体长度:7.7mm;工作寿命:2000hrs@105℃;工作温度:-55℃~+105℃;", JLCPCB Part Class=扩展库, LCSC Part Name="470uF ±20% 16V", Lifetime @ Temp=2000hrs@105℃, Manufacturer=ROQANG(容强), Operating Temperature=-55℃~+105℃, Rated Voltage=16V, Tolerance=±20%, Add into BOM=yes, Convert to PCB=yes, Device=RVT1C471M0607, L=7.7mm, Manufacturer Part=RVT1C471M0607, Name=470uF, Supplier=LCSC, Supplier Footprint=SMD,6.3x7.7mm, Supplier Part=C2977552, Symbol=RVT1C471M0607, φD=6.3mm
C29 C30: library part C1608X6S1A225K080AB, "容值:2.2uF;精度:±10%;额定电压:10V;材质(温度系数):X6S;", LCSC Part Name="2.2uF ±10% 10V", Manufacturer=TDK, Temperature Coefficient=X6S, Tolerance=±10%, Voltage Rated=10V, Add into BOM=yes, Convert to PCB=yes, Device=C1608X6S1A225K080AB, Manufacturer Part=C1608X6S1A225K080AB, Name=2.2uF, Supplier=LCSC, Supplier Footprint=0603, Supplier Part=C3888161, Symbol=C1608X6S1A225K080AB
C40: "RST宽温通用品 105℃2000小时 等同RVT VT XT系列贴片电解电容", Capacitance=47uF, JLCPCB Part Class=扩展库, LCSC Part Name="贴片型铝电解电容 47uF ±20% 16V", Manufacturer=KNSCHA(科尼盛), Add into BOM=yes, Convert to PCB=yes, Device=RST47UF16V034, Manufacturer Part=RST47UF16V034, Name=RST47UF16V034, Supplier=LCSC, Supplier Footprint=SMD,5x5.4mm, Supplier Part=C4747957, Symbol=RST47UF16V034
CARD1: library part TF-01A_C2889258, "卡类型:MicroSD卡(TF卡);连接器类型:卡座;卡连接方式:自弹式;本体最大高度:2mm;工作温度范围:-;", JLCPCB Part Class=扩展库, LCSC Part Name=TF卡座自弹式9P外焊卡座, Manufacturer=Yuandi(元迪), Operating Temperature Range=-, Add into BOM=yes, Card Connection Mode=自弹式, Card Type=MicroSD卡(TF卡), Connector Type=卡座, Convert to PCB=yes, Datasheet=https://atta.szlcsc.com/upload/public/pdf/source/20210830/44259D2B93BF4B637A446EF1520C4989.pdf, Device=TF-01A_C2889258, Manufacturer Part=TF-01A, Maximum Body Height=2mm, Name=TF-01A, Supplier=LCSC, Supplier Footprint=SMD, Supplier Part=C2889258, Symbol=TF-01A_C2889258
CN1 CN2: "参考系列:XH;间距:2.54mm;插针结构:1x2P;排数:1;每排PIN数:2;行距:-;公母:公型插针;安装方式:直插;额定电流:3A;触头材质:黄铜;触头镀层:锡;工作温度范围:-25℃~+85℃;焊接温度(最大值):260℃;", Current Rating (Max)=3A, JLCPCB Part Class=扩展库, LCSC Part Name="系列:XH 间距:2.54mm 1x2P 直插", Manufacturer=Megastar(兆星), Operating Temperature Range=-25℃~+85℃, Welding Temperature (Max)=260℃, Add into BOM=yes, Contact Material=黄铜, Contact Plating=锡, Convert to PCB=yes, Datasheet=https://atta.szlcsc.com/upload/public/pdf/source/20230619/19BA6947230AA44A04D3EDD65E618FD0.pdf, Device=ZX-XH2.54-2PZZ, Gender=公型插针, Manufacturer Part=ZX-XH2.54-2PZZ, Mounting Style=直插, Name=ZX-XH2.54-2PZZ, Number of PINs Per Row=2, Number of Rows=1, Pins Structure=1x2P, Pitch=2.54mm, Reference Series=XH, Row Spacing=-, Supplier=LCSC, Supplier Footprint=插件,P=2.54mm, Supplier Part=C7429632, Symbol=ZX-XH2.54-2PZZ
D3 R1 R2 R3 R4: JLCPCB Part Class=扩展库, Add into BOM=yes, Convert to PCB=yes, Supplier=LCSC
  D3: Datasheet=2022-07-04/534833A/5ff3008f79ea4c6ab22b1f3463cee262/20210714020425519.pdf, Device=SS34, LCSC Part Name=SS34, Manufacturer Part=SS34, Name=SS34, Supplier Footprint=SMA,DO-214AC, Supplier Part=C9900023345, Symbol=SS34_C9900023345
  R1 R2 R3 R4: Device=1k, LCSC Part Name=1k, Manufacturer Part=1k, Name=1k, Supplier Footprint=R0603, Supplier Part=C9900012840, Symbol=1K
DC1: "DC-005 外径6.4 内芯2.0 3A电流 DC电源插座", JLCPCB Part Class=扩展库, Manufacturer=XUNPU(讯普), Add into BOM=yes, Convert to PCB=yes, Datasheet=https://atta.szlcsc.com/upload/public/pdf/source/20200812/C720557_2286DFCD6C75B71AF905731F627ABF3A.pdf, Device=DC-005-A200, LCSC Part Name=DC-005-A200, Manufacturer Part=DC-005-A200, Name=DC-005-A200, Supplier=LCSC, Supplier Footprint=14×9.0×11.0mm, Supplier Part=C720557, Symbol=DC-005-A200
H2: "排数:单排;总孔位数:3P;间距:2.54mm;插孔结构:1x3P;行距:-;安装类型:直插;塑高:-;触头材质:黄铜;触头镀层:-;", JLCPCB Part Class=扩展库, LCSC Part Name="间距:2.54mm 1x3P 直插", Manufacturer=XFCN(兴飞), Add into BOM=yes, Contact Material=黄铜, Contact Plating=-, Convert to PCB=yes, Datasheet=https://atta.szlcsc.com/upload/public/pdf/source/20200518/C541849_85853D71FC67C51915A806977A588FDA.pdf, Device=PM254V-11-03-H85, Holes Structure=1x3P, Insulation Height=-, Manufacturer Part=PM254V-11-03-H85, Mounting Type=直插, Name=PM254V-11-03-H85, Number of Holes=3P, Number of Rows=单排, Pitch=2.54mm, Row Spacing=-, Supplier=LCSC, Supplier Footprint=插件,P=2.54mm, Supplier Part=C541850, Symbol=PM254V-11-03-H85
L1: library part SWPA6045S680MT, "类型:-;电感值:68uH;精度:±20%;额定电流:1A;饱和电流(Isat):1.2A;", DC Resistance (DCR)=289mΩ, JLCPCB Part Class=扩展库, LCSC Part Name="68uH ±20% 1.2A", Manufacturer=Sunlord(顺络), Rated Current=1A, Ratings=-, Saturation Current (Isat)=1.2A, Tolerance=±20%, Add into BOM=yes, Convert to PCB=yes, Datasheet=https://atta.szlcsc.com/upload/public/pdf/source/20210916/AC798BA7E846B7D0B6818F45CD84DB0B.pdf, Device=SWPA6045S680MT, Manufacturer Part=SWPA6045S680MT, Name=68uH, Supplier=LCSC, Supplier Footprint=SMD, Supplier Part=C53663, Symbol=SWPA6045S680MT, Type=-
LED1 LED2: "发光颜色:翠绿色;功率:72mW;透镜颜色:无色透明;主波长:515nm~530nm;发光强度:330mcd~900mcd;发光角度:130°;工作温度:-30℃~+85℃;", Emitted Color=翠绿色, Forward Current=10mA, Forward Voltage (VF)=2.6V~3.6V, JLCPCB Part Class=扩展库, LCSC Part Name="翠绿 0603翠绿  正贴", Lens Color=无色透明, Manufacturer=国星光电, Operating Temperature=-30℃~+85℃, Power Dissipation=72mW, Add into BOM=yes, Convert to PCB=yes, Datasheet=https://atta.szlcsc.com/upload/public/pdf/source/20200820/C84267_04BA7703640BAC111D09F5EFB971FBF3.pdf, Device=NCD0603G1, Dominant Wavelength=515nm~530nm, Luminous Intensity=330mcd~900mcd, Manufacturer Part=NCD0603G1, Name=NCD0603G1, Supplier=LCSC, Supplier Footprint=0603, Supplier Part=C84267, Symbol=FC-D1608UGK-520D10, Viewing Angle=130°
MIC1: JLCPCB Part Class=扩展库, LCSC Part Name="全指向φ9.7*6.7mm 1.5V-10V 灵敏度-52db 低阻抗 针脚", Manufacturer=INGHAi(赢海), Add into BOM=yes, Convert to PCB=yes, Datasheet=https://atta.szlcsc.com/upload/public/pdf/source/20200113/C234023_1CE1EA91B70FB2D654251C10F12F6FAC.pdf, Device=GMI9767P-52DB, Manufacturer Part=GMI9767P-52DB, Name=GMI9767P-52DB, Supplier=LCSC, Supplier Footprint=插件, Supplier Part=C234023, Symbol=GMI9767P-52DB
P1 P2: "Header, 4-Pin, Dual row", LatestRevisionDate=17-Jul-2002, LatestRevisionNote="Re-released for DXP Platform.", Publisher="Altium Limited"
Q2 Q4 Q6: library part SS8050_C2150, "直流电流增益(hFE@Ic,Vce):200@100mA,1V;功率(Pd):300mW;集射极击穿电压(Vceo):25V;集电极电流(Ic):1.5A;晶体管类型:NPN;", Collector Current (Ic)=1.5A, Collector Cut-Off Current (Icbo)=100nA, Collector-Emitter Breakdown Voltage (Vceo)=25V, Collector-Emitter Saturation Voltage (VCE(sat)@Ic,Ib)=500mV@800mA,80mA, DC Current Gain (hFE@Ic,Vce)=200@100mA,1V, JLCPCB Part Class=基础库, LCSC Part Name="耐压:25V 电流:1.5A NPN Y1 200-350", Manufacturer=CJ(江苏长电/长晶), Operating Temperature=+150℃@(Tj), Power Dissipation (Pd)=300mW, Transition Frequency (fT)=100MHz, Add into BOM=yes, Convert to PCB=yes, Datasheet=https://atta.szlcsc.com/upload/public/pdf/source/20230322/AEE86F4B043774EFF80CAEA14A37D9E9.pdf, Device=SS8050_C2150, Manufacturer Part=SS8050, Name=SS8050, Supplier=LCSC, Supplier Footprint=SOT-23, Supplier Part=C2150, Symbol=SS8050_C2150, Transistor Type=NPN
Q5: JLCPCB Part Class=扩展库, LCSC Part Name="PNP -25V -1.5A 120-400 SOT-23", Manufacturer=Doeshare(德芯), Add into BOM=yes, Convert to PCB=yes, Datasheet=https://atta.szlcsc.com/upload/public/pdf/source/20220104/E36293975455CDB0A899354BE4C8E85F.pdf, Device=SS8550, Manufacturer Part=SS8550, Name=SS8550, Supplier=LCSC, Supplier Footprint=SOT-23, Supplier Part=C2931718, Symbol=SS8550_C2931718
R5: library part 0603WAF1004T5E, "电阻类型:厚膜电阻;阻值:1MΩ;精度:±1%;功率:100mW;温度系数:±100ppm/℃;", JLCPCB Part Class=基础库, LCSC Part Name="厚膜电阻 1MΩ ±1% 100mW", Manufacturer=UNI-ROYAL(厚声), Operating Temperature Range=-55℃~+155℃, Overload Voltage (Max)=75V, Power(Watts)=100mW, Temperature Coefficient=±100ppm/℃, Tolerance=±1%, Add into BOM=yes, Convert to PCB=yes, Datasheet=https://atta.szlcsc.com/upload/public/pdf/source/20200306/C422600_1E6D84923E4A46A82E41ADD87F860B5C.pdf, Device=0603WAF1004T5E, Manufacturer Part=0603WAF1004T5E, Name=1MΩ, Supplier=LCSC, Supplier Footprint=0603, Supplier Part=C22935, Symbol=0603WAF1004T5E, Type=厚膜电阻
R6 R7: library part ERJ3EKF1003V, "电阻类型:厚膜电阻;阻值:100kΩ;精度:±1%;功率:100mW;温度系数:±100ppm/℃;", JLCPCB Part Class=扩展库, LCSC Part Name="厚膜电阻 100kΩ ±1% 100mW", Manufacturer=PANASONIC(松下), Operating Temperature Range=-55℃~+155℃, Overload Voltage (Max)=-, Power(Watts)=100mW, Temperature Coefficient=±100ppm/℃, Tolerance=±1%, Add into BOM=yes, Convert to PCB=yes, Datasheet=https://atta.szlcsc.com/upload/public/pdf/source/20180524/C193239_FFEA89BB7F9859C8C42240F47AD03C60.pdf, Device=ERJ3EKF1003V, Manufacturer Part=ERJ3EKF1003V, Name=100kΩ, Supplier=LCSC, Supplier Footprint=0603, Supplier Part=C189597, Symbol=ERJ3EKF1003V, Type=厚膜电阻
R8 R13 R14 R15 R17 R18 R19: library part SCR0603J10K, "阻值:10kΩ;精度:±5%;", JLCPCB Part Class=扩展库, LCSC Part Name="10kΩ ±5%", Manufacturer=VO(翔胜), Tolerance=±5%, Add into BOM=yes, Convert to PCB=yes, Datasheet=https://atta.szlcsc.com/upload/public/pdf/source/20220513/247AF9639BA21CF93567DC289CCC6A22.pdf, Device=SCR0603J10K, Manufacturer Part=SCR0603J10K, Name=10kΩ, Supplier=LCSC, Supplier Footprint=0603, Supplier Part=C3017715, Symbol=SCR0603J10K
R9 R22 R23 R24 R50 R51 R52: library part SCR0603F1K, "阻值:1kΩ;精度:±1%;", JLCPCB Part Class=扩展库, LCSC Part Name="1kΩ ±1%", Manufacturer=VO(翔胜), Tolerance=±1%, Add into BOM=yes, Convert to PCB=yes, Datasheet=https://atta.szlcsc.com/upload/public/pdf/source/20220513/247AF9639BA21CF93567DC289CCC6A22.pdf, Device=SCR0603F1K, Manufacturer Part=SCR0603F1K, Name=1kΩ, Supplier=LCSC, Supplier Footprint=0603, Supplier Part=C3016283, Symbol=SCR0603F1K
R11: library part 3362P-1-103, "阻值:10kΩ;精度:±10%;", JLCPCB Part Class=扩展库, LCSC Part Name="10kΩ ±10%", Manufacturer=BOCHEN(博晨), Tolerance=±10%, Add into BOM=yes, Convert to PCB=yes, Datasheet=https://atta.szlcsc.com/upload/public/pdf/source/20171114/C118956_15106326650691117445.pdf, Device=3362P-1-103, Manufacturer Part=3362P-1-103, Name=10kΩ, Supplier=LCSC, Supplier Footprint=插件, Supplier Part=C118956, Symbol=3362P-1-103_C118956
R12: library part RC0603JR-130RL, "电阻类型:厚膜电阻;阻值:0Ω;精度:-;功率:100mW;", JLCPCB Part Class=扩展库, LCSC Part Name="0Ω 100mW", Manufacturer=YAGEO(国巨), Operating Temperature Range=-55℃~+155℃, Overload Voltage (Max)=75V, Power(Watts)=100mW, Temperature Coefficient=-, Add into BOM=yes, Convert to PCB=yes, Datasheet=https://atta.szlcsc.com/upload/public/pdf/source/20210615/C1512169_F749B83676031E9170C7C93785487C19.pdf, Device=RC0603JR-130RL, Manufacturer Part=RC0603JR-130RL, Name=0Ω, Supplier=LCSC, Supplier Footprint=0603, Supplier Part=C1512169, Symbol=RC0603JR-130RL, Tolerance=-, Type=厚膜电阻
R16: library part CRCW06031M00JNEAC, "电阻类型:厚膜电阻;阻值:1MΩ;精度:±5%;功率:100mW;", JLCPCB Part Class=扩展库, LCSC Part Name="1MΩ ±5% 100mW", Manufacturer=VISHAY(威世), Operating Temperature Range=-55℃~+155℃, Overload Voltage (Max)=75V, Power(Watts)=100mW, Temperature Coefficient=±200ppm/℃, Tolerance=±5%, Add into BOM=yes, Convert to PCB=yes, Datasheet=https://atta.szlcsc.com/upload/public/pdf/source/20210501/3A8C68602BA6317D7357138250FC3EA2.pdf, Device=CRCW06031M00JNEAC, Manufacturer Part=CRCW06031M00JNEAC, Name=1MΩ, Supplier=LCSC, Supplier Footprint=0603, Supplier Part=C1511824, Symbol=CRCW06031M00JNEAC, Type=厚膜电阻
R20: library part SCR0603J2K2, "阻值:2.2kΩ;精度:±5%;", JLCPCB Part Class=扩展库, LCSC Part Name="2.2kΩ ±5%", Manufacturer=VO(翔胜), Tolerance=±5%, Add into BOM=yes, Convert to PCB=yes, Datasheet=https://atta.szlcsc.com/upload/public/pdf/source/20220513/247AF9639BA21CF93567DC289CCC6A22.pdf, Device=SCR0603J2K2, Manufacturer Part=SCR0603J2K2, Name=2.2kΩ, Supplier=LCSC, Supplier Footprint=0603, Supplier Part=C3017730, Symbol=SCR0603J2K2
R21: library part TC0325B3300T5F, "阻值:330Ω;精度:±0.1%;功率:100mW;温度系数:±25ppm/℃;电阻类型:薄膜电阻;", JLCPCB Part Class=扩展库, LCSC Part Name="330Ω ±0.1% 100mW 薄膜电阻", Manufacturer=UNI-ROYAL(厚声), Overload Voltage (Max)=75V, Power(Watts)=100mW, Temperature Coefficient=±25ppm/℃, Tolerance=±0.1%, Add into BOM=yes, Convert to PCB=yes, Datasheet=https://atta.szlcsc.com/upload/public/pdf/source/20220708/6ACD1707201702E70C0F417A19EB926E.pdf, Device=TC0325B3300T5F, Manufacturer Part=TC0325B3300T5F, Name=330Ω, Supplier=LCSC, Supplier Footprint=0603, Supplier Part=C2989271, Symbol=TC0325B3300T5F, Type=薄膜电阻
SW1 SW2 SW3 SW4: "触点电流:50mA;额定电压(DC):12V;绝缘电阻:100MΩ;安装方式:立贴;作用力:250gf@±30gf;机械寿命:1000000;工作温度:-25℃~+85℃;开关长度:6mm;开关宽度:6mm;开关高度:5mm;", Contact Current=50mA, Insulation Resistance=100MΩ, JLCPCB Part Class=扩展库, Manufacturer=韩国韩荣, Operating Force=250gf@±30gf, Operating Temperature=-25℃~+85℃, Voltage Rating (DC)=12V, Add into BOM=yes, Convert to PCB=yes, Datasheet=https://atta.szlcsc.com/upload/public/pdf/source/20200721/C707344_FB3B602593668C8FE1542A3F64DDEE0A.pdf, Device=K2-6639SP-C4SC-04, LCSC Part Name=K2-6639SP-C4SC-04, Manufacturer Part=K2-6639SP-C4SC-04, Mechanical Life=1000000, Mounting Sytle=立贴, Name=K2-6639SP-C4SC-04, Supplier=LCSC, Supplier Footprint=SMD, Supplier Part=C879344, Switch Height=5mm, Switch Length=6mm, Switch Width=6mm, Symbol=K2-6639SP-C4SC-04_C879344
U5 U41: library part RTX032001BETP, "阻值:2kΩ;精度:±0.1%;", LCSC Part Name="2kΩ ±0.1%", Manufacturer=RALEC(旺诠), Temperature Coefficient=±50ppm/℃, Tolerance=±0.1%, Add into BOM=yes, Convert to PCB=yes, Datasheet=https://atta.szlcsc.com/upload/public/pdf/source/20220822/046AFDAF81466BFF443BF7BC902F6DB1.pdf, Device=RTX032001BETP, Manufacturer Part=RTX032001BETP, Name=2kΩ, Supplier=LCSC, Supplier Footprint=0603, Supplier Part=C5141181, Symbol=RTX032001BETP
U6: "MP3芯片", JLCPCB Part Class=扩展库, Manufacturer=VLSI, Add into BOM=yes, Convert to PCB=yes, Datasheet=https://atta.szlcsc.com/upload/public/pdf/source/20121114/1457706558124.pdf, Device=VS1053B-L, LCSC Part Name=VS1053B-L, Manufacturer Part=VS1053B-L, Name=VS1053B-L, Supplier=LCSC, Supplier Footprint=LQFP-48(7x7), Supplier Part=C9922, Symbol=VS1053B
U7 U8 U36 U37 U38 U39: library part C1608CH2A180J080AA, "容值:18pF;精度:±5%;额定电压:100V;材质(温度系数):CH;", JLCPCB Part Class=扩展库, LCSC Part Name="18pF ±5% 100V", Manufacturer=TDK, Temperature Coefficient=CH, Tolerance=±5%, Voltage Rated=100V, Add into BOM=yes, Convert to PCB=yes, Device=C1608CH2A180J080AA, Manufacturer Part=C1608CH2A180J080AA, Name=18pF, Supplier=LCSC, Supplier Footprint=-, Supplier Part=C3847790, Symbol=C1608CH2A180J080AA
U9 U17: library part CGA3E3X5R1V105M080AB, "容值:1uF;精度:±20%;额定电压:35V;材质(温度系数):X5R;", LCSC Part Name="1uF ±20% 35V", Manufacturer=TDK, Temperature Coefficient=X5R, Tolerance=±20%, Voltage Rated=35V, Add into BOM=yes, Convert to PCB=yes, Device=CGA3E3X5R1V105M080AB, Manufacturer Part=CGA3E3X5R1V105M080AB, Name=1uF, Supplier=LCSC, Supplier Footprint=0603, Supplier Part=C3910162, Symbol=CGA3E3X5R1V105M080AB
U10: "输出类型:固定;输出极性:正;最大输入电压:18V;输出电压:1.8V;输出电流:1A;电源纹波抑制比(PSRR):-;", Dropout Voltage=1.4V@(1A), JLCPCB Part Class=扩展库, LCSC Part Name="输入18V 输出1.8V 1A", Manufacturer=PUOLOP(迪浦), Maximum Input Voltage=18V, Output Current=1A, Output Voltage=1.8V, Power Supply Rejection Ratio (PSRR)=-, Add into BOM=yes, Convert to PCB=yes, Device=AMS1117-1.8, Manufacturer Part=AMS1117-1.8, Name=AMS1117-1.8, Number of Outputs=1, Output Polarity=正, Output Type=固定, Supplier=LCSC, Supplier Footprint=SOT-223-4, Supplier Part=C351432, Symbol=AMS1117-1.8_C351432
U11: "排数:双排;总孔位数:18P;间距:2.54mm;插孔结构:2x9P;行距:2.54mm;安装类型:直插;圆孔/方孔:方孔;额定电流:3A;额定电压:-;插孔方向:顶部;塑高:8.5mm;工作温度范围:-40℃~+105℃;", Current Rating (Max)=3A, JLCPCB Part Class=扩展库, LCSC Part Name="间距:2.54mm 2x9P 直插", Manufacturer=HCTL(华灿天禄), Operating Temperature Range=-40℃~+105℃, Voltage Rating (Max)=-, Add into BOM=yes, Circular Hole / Square Hole=方孔, Convert to PCB=yes, Datasheet=https://atta.szlcsc.com/upload/public/pdf/source/20230609/3D36CA2C1BFC9FD1C3F709AD9DFEB9C2.pdf, Device=PM254-2-09-Z-8.5, Holes Direction=顶部, Holes Structure=2x9P, Insulation Height=8.5mm, Manufacturer Part=PM254-2-09-Z-8.5, Mounting Type=直插, Name=PM254-2-09-Z-8.5, Number of Holes=18P, Number of Rows=双排, Pitch=2.54mm, Row Spacing=2.54mm, Supplier=LCSC, Supplier Footprint=插件,P=2.54mm, Supplier Part=C2897410, Symbol=PM254-2-09-Z-8.5
U12: "功能类型:降压型;输入电压:-;输出电流(最大值):-;", Input Voltage=-, JLCPCB Part Class=基础库, Manufacturer=XLSEMI(芯龙), Add into BOM=yes, Convert to PCB=yes, Datasheet=https://atta.szlcsc.com/upload/public/pdf/source/20151126/1457707596805.pdf, Device=XL1509-5.0E1, Function=降压型, LCSC Part Name=XL1509-5.0E1, Manufacturer Part=XL1509-5.0E1, Name=XL1509-5.0E1, Number of Outputs=-, Output Current (Max)=-, Supplier=LCSC, Supplier Footprint=SOP-8, Supplier Part=C61063, Switching Frequency=-, Symbol=XL1509-5.0E1, Synchronous Rectification=-, Topology=-
U13: "音频功率放大器的类型:Class AB;输出类型:-;输出功率:1.8W x 1 @ 4Ω;工作电压:3V ~ 5.25V;", JLCPCB Part Class=扩展库, Manufacturer=Nsiway(纳芯威), Max Output Power x Channels @ Load="1.8W x 1 @ 4Ω", Voltage - Supply="3V ~ 5.25V", Add into BOM=yes, Convert to PCB=yes, Datasheet=https://atta.szlcsc.com/upload/public/pdf/source/20190704/C189960_42E000A0092060C3B2B5B31BC13BD104.pdf, Device=NS8002, Features=关机, LCSC Part Name=NS8002, Manufacturer Part=NS8002, Name=NS8002, Output Type=-, Supplier=LCSC, Supplier Footprint=SOP-8-EP-150mil, Supplier Part=C189960, Symbol=NS8002, Type="Class AB"
U14 U15 U22: library part PCAN0603E10R0BST5, "电阻类型:薄膜电阻;阻值:10Ω;精度:±0.1%;功率:500mW;", JLCPCB Part Class=扩展库, LCSC Part Name="10Ω ±0.1% 500mW", Manufacturer=VISHAY(威世), Operating Temperature Range=-55℃~+155℃, Overload Voltage (Max)=75V, Power(Watts)=500mW, Temperature Coefficient=±25ppm/℃, Tolerance=±0.1%, Add into BOM=yes, Convert to PCB=yes, Datasheet=https://atta.szlcsc.com/upload/public/pdf/source/20210606/BB102AFC1F3ADA31AF003395293DA88D.pdf, Device=PCAN0603E10R0BST5, Manufacturer Part=PCAN0603E10R0BST5, Name=10Ω, Supplier=LCSC, Supplier Footprint=0603, Supplier Part=C2091258, Symbol=PCAN0603E10R0BST5, Type=薄膜电阻
U16 U42: library part C1608X8R2A103K080AA, "容值:10nF;精度:±10%;额定电压:100V;材质(温度系数):X8R;", LCSC Part Name="10nF ±10% 100V", Manufacturer=TDK, Temperature Coefficient=X8R, Tolerance=±10%, Voltage Rated=100V, Add into BOM=yes, Convert to PCB=yes, Device=C1608X8R2A103K080AA, Manufacturer Part=C1608X8R2A103K080AA, Name=10nF, Supplier=LCSC, Supplier Footprint=0603, Supplier Part=C3865495, Symbol=C1608X8R2A103K080AA
U18: "间距：2.0mm 总PIN位数：2 排数1行距：2.0mm 安类型：直插 圆针：圆针 额定电流：3A 配合针长度：3.7mm 塑高：3mm 端接针长度：3.7mm 触头材质：黄铜 触头镀层：金 工作温度范围：-40℃~+105℃ 焊接温度(最大值)：260℃ 颜色：黑", JLCPCB Part Class=扩展库, Manufacturer=HCTL(华灿天禄), Add into BOM=yes, Convert to PCB=yes, Datasheet=https://atta.szlcsc.com/upload/public/pdf/source/20230609/CA4823EE069156B840028BF818EA617F.pdf, Device=PZ200-1-02-Z-C, LCSC Part Name=PZ200-1-02-Z-C, Manufacturer Part=PZ200-1-02-Z-C, Name=PZ200-1-02-Z-C, Supplier=LCSC, Supplier Footprint=插件,P=2mm, Supplier Part=C5159793, Symbol=PZ200-1-02-Z-C
U19: "输出类型:固定;输出极性:正;输出通道数:1;最大输入电压:18V;输出电压:3.3V;压差:1.3V@(1A);输出电流:1A;电源纹波抑制比(PSRR):60dB@(120Hz);工作温度:±150℃@(Tj);", Dropout Voltage=1.3V@(1A), JLCPCB Part Class=扩展库, LCSC Part Name="正 Vin=18V Vout=3.3V 1A 60dB@(120Hz)", Manufacturer=YONGYUTAI(永裕泰), Maximum Input Voltage=18V, Operating Temperature=±150℃@(Tj), Output Current=1A, Output Voltage=3.3V, Power Supply Rejection Ratio (PSRR)=60dB@(120Hz), Add into BOM=yes, Convert to PCB=yes, Datasheet=https://atta.szlcsc.com/upload/public/pdf/source/20210901/A75ADDE6A17DEE0002F2A58A8D1F3634.pdf, Device=AMS1117-3.3, Manufacturer Part=AMS1117-3.3, Name=AMS1117-3.3, Number of Outputs=1, Output Polarity=正, Output Type=固定, Supplier=LCSC, Supplier Footprint=SOT-223-3, Supplier Part=C2891839, Symbol=AMS1117-3.3_C2891839
U20 U21: library part ESK106M1HD11RRSNP-R, "容值:10uF;精度:±20%;额定电压:50V;纹波电流:-;等效串联电阻:-;", Equivalent Series Resistance(ESR)=-, JLCPCB Part Class=扩展库, LCSC Part Name="10uF ±20% 50V", Manufacturer="MAN YUE(万裕科技)", Rated Voltage=50V, Tolerance=±20%, Add into BOM=yes, Convert to PCB=yes, Datasheet=https://atta.szlcsc.com/upload/public/pdf/source/20190724/C406799_CDF11B2185D3B9C175922EABD678815E.pdf, Device=ESK106M1HD11RRSNP-R, L=11mm, Lead Spacing=-, Lifetime @ Temp=-, Manufacturer Part=ESK106M1HD11RRSNP-R, Name=10uF, Operating Temperature=-, Ripple Current=-, Supplier=LCSC, Supplier Footprint=插件, Supplier Part=C3015490, Symbol=ESK106M1HD11RRSNP-R, φD=5mm
U27 U28 U29 U44: library part C1608JB1C106M080AB, "容值:10uF;精度:±20%;额定电压:16V;材质(温度系数):JB;", LCSC Part Name="10uF ±20% 16V", Manufacturer=TDK, Temperature Coefficient=JB, Tolerance=±20%, Voltage Rated=16V, Add into BOM=yes, Convert to PCB=yes, Device=C1608JB1C106M080AB, Manufacturer Part=C1608JB1C106M080AB, Name=10uF, Supplier=LCSC, Supplier Footprint=0603, Supplier Part=C3866185, Symbol=C1608JB1C106M080AB
U35 U45: "参考系列:XH;间距:2.54mm;插针结构:1x4P;排数:1;每排PIN数:4;行距:-;公母:公型插针;安装方式:直插;额定电流:3A;触头材质:黄铜;触头镀层:锡;工作温度范围:-25℃~+85℃;焊接温度(最大值):260℃;", Current Rating (Max)=3A, JLCPCB Part Class=扩展库, LCSC Part Name="系列:XH 间距:2.54mm 1x4P 直插", Manufacturer=Megastar(兆星), Operating Temperature Range=-25℃~+85℃, Welding Temperature (Max)=260℃, Add into BOM=yes, Contact Material=黄铜, Contact Plating=锡, Convert to PCB=yes, Datasheet=https://atta.szlcsc.com/upload/public/pdf/source/20230619/B529A2163E0159A644AB3383D208FB03.pdf, Device=ZX-XH2.54-4PZZ, Gender=公型插针, Manufacturer Part=ZX-XH2.54-4PZZ, Mounting Style=直插, Name=ZX-XH2.54-4PZZ, Number of PINs Per Row=4, Number of Rows=1, Pins Structure=1x4P, Pitch=2.54mm, Reference Series=XH, Row Spacing=-, Supplier=LCSC, Supplier Footprint=插件,P=2.54mm, Supplier Part=C7429634, Symbol=ZX-XH2.54-4PZZ
U40: "CPU内核:ARM Cortex-M4;CPU最大主频:168MHz;工作电压范围:1.8V~3.6V;程序存储容量:512KB;程序存储器类型:FLASH;RAM总容量:192KB;GPIO端口数量:114;", JLCPCB Part Class=扩展库, Low-Voltage Detect=有, Manufacturer=ST(意法半导体), Operating Temperature Range=-40℃~+85℃, Operating Voltage Range=1.8V~3.6V, ADC (Bit)=12bit, Add into BOM=yes, CCP Capture/Compare=-, communication protocol=-, Convert to PCB=yes, CPU Core="ARM Cortex-M4", CPU Maximum Speed=168MHz, DAC (Bit)=12bit, Datasheet=https://atta.szlcsc.com/upload/public/pdf/source/20160816/1471342957598.pdf, Device=STM32F407ZET6, Direct Memory Access=有, EEPROM=-, GPIO Ports Number=114, image=http://image.lceda.cn/szlcsc/C36869.jpg, Infrared Data Association=有, Internal Comparator=-, Internal Oscillator=有, LCD Module=有, LCSC Part Name=STM32F407ZET6, Manufacturer Part=STM32F407ZET6, Name=STM32F407ZET6, Program Memory Type=FLASH, Program Storage Size=512KB, PWM (Bit)=-, RAM Size=192KB, Real-Time Clock=-, Secure Digital Input and Output=-, Supplier=LCSC, Supplier Footprint=LQFP-144(20x20), Supplier Part=C36869, Symbol=STM32F407ZET6, tags=STM32, Universal Serial Bus=有, Watchdog=有
U43: "漏源电压(Vdss):20V;连续漏极电流(Id):2.3A;功率(Pd):700mW;类型:P沟道;导通电阻(RDS(on)@Vgs,Id):126mΩ@4.5V;", Continuous Drain Current (Id)=2.3A, Drain Source On Resistance (RDS(on)@Vgs,Id)=126mΩ@4.5V, Drain Source Voltage (Vdss)=20V, Gate Threshold Voltage (Vgs(th)@Id)=1V@250uA, Input Capacitance (Ciss@Vds)=285pF, JLCPCB Part Class=扩展库, LCSC Part Name="P沟道 耐压:20V 电流:2.3A", Manufacturer="HXY MOSFET(华轩阳电子)", Power Dissipation (Pd)=700mW, Add into BOM=yes, Convert to PCB=yes, Datasheet=https://atta.szlcsc.com/upload/public/pdf/source/20230515/2FF2907841563ED329594D3237822724.pdf, Device=SI2301-ZE, Manufacturer Part=SI2301-ZE, Name=SI2301-ZE, Supplier=LCSC, Supplier Footprint=SOT-23, Supplier Part=C5261052, Symbol=SI2301-ZE, Type=P沟道
U46: JLCPCB Part Class=扩展库, LCSC Part Name="排针 2*25 2.54 11.6MM 镀金", Manufacturer=ZHOURI(洲日), Add into BOM=yes, Convert to PCB=yes, Device=PZ2.54-2*25, Manufacturer Part=PZ2.54-2*25, Name=PZ2.54-2*25, Supplier=LCSC, Supplier Footprint=DIP, Supplier Part=C5360897, Symbol=PZ2.54-2*25
U47 U48: library part AR03FTDX4701A, "电阻类型:薄膜电阻;阻值:4.7kΩ;精度:±1%;功率:100mW;", JLCPCB Part Class=扩展库, LCSC Part Name="4.7kΩ ±1% 100mW", Manufacturer=Viking(光颉), Operating Temperature Range=-55℃~+155℃, Overload Voltage (Max)=75V, Power(Watts)=100mW, Temperature Coefficient=±50ppm/℃, Tolerance=±1%, Add into BOM=yes, Convert to PCB=yes, Datasheet=https://atta.szlcsc.com/upload/public/pdf/source/20211123/7AFDB03DAF68AA91648A852AAE26A3AB.pdf, Device=AR03FTDX4701A, Manufacturer Part=AR03FTDX4701A, Name=4.7kΩ, Supplier=LCSC, Supplier Footprint=0603, Supplier Part=C2924150, Symbol=AR03FTDX4701A, Type=薄膜电阻
X1: library part SX3B12.288F2010F30, "频率:12.288MHz;频率公差:±10ppm;负载电容:20pF;", Equivalent Series Resistance (ESR)=100Ω, Frequency Stability=±30ppm, Frequency Tolerance=±10ppm, JLCPCB Part Class=扩展库, LCSC Part Name="12.288MHz ±10ppm 20pF", Load Capacitance=20pF, Manufacturer=SCTF(星通时频), Operating Temperature=-40℃~+85℃, Add into BOM=yes, Convert to PCB=yes, Crystal Type=贴片无源晶振, Datasheet=https://atta.szlcsc.com/upload/public/pdf/source/20211009/3804C1E26C475A85A55BFB80BFD4FE9A.pdf, Device=SX3B12.288F2010F30, Manufacturer Part=SX3B12.288F2010F30, Name=12.288MHz, Supplier=LCSC, Supplier Footprint=SMD3225-4P, Supplier Part=C2901655, Symbol=SX3B12.288F2010F30
X2: library part TAXM8M2QLFCDT1T, "频率:8MHz;频率公差:±30ppm;负载电容:20pF;", Equivalent Series Resistance (ESR)=80Ω, Frequency Stability=±20ppm, Frequency Tolerance=±30ppm, JLCPCB Part Class=扩展库, LCSC Part Name="8MHz ±30ppm 20pF", Load Capacitance=20pF, Manufacturer=TAE(雅晶鑫), Operating Temperature=-40℃~+85℃, Add into BOM=yes, Convert to PCB=yes, Crystal Type=贴片无源晶振, Datasheet=https://atta.szlcsc.com/upload/public/pdf/source/20220113/59EE8A0E7B9F67FF1BF3C454890DE4E5.pdf, Device=TAXM8M2QLFCDT1T, Manufacturer Part=TAXM8M2QLFCDT1T, Name=8MHz, Supplier=LCSC, Supplier Footprint=SMD5032-2P, Supplier Part=C122522, Symbol="SMD-5032_2P 8M 20pf 30ppm"
X3: library part TFX-04-32.768K, "频率:-;负载电容:-;", JLCPCB Part Class=扩展库, LCSC Part Name="时钟晶体 32.768kHz 4PF 20PPM", Manufacturer=RIVER(大河), Add into BOM=yes, Convert to PCB=yes, Crystal Type=-, Datasheet=https://atta.szlcsc.com/upload/public/pdf/source/20200917/C515346_EDFB4A3F7406CD145B2E2A90CB656616.pdf, Device=TFX-04-32.768K, Load Capacitance=-, Manufacturer Part=TFX-04-32.768K, Name=-, Operating Temperature=-, Supplier=LCSC, Supplier Footprint=SMD1610-2P, Supplier Part=C515348, Symbol=TFX-04-32.768K_C515348

## Via types
v1: diameter 20, hole 16, Top Layer to Bottom Layer, 196 vias